# EAGLE board E-Piano-SM (EAGLE 9.4.0)
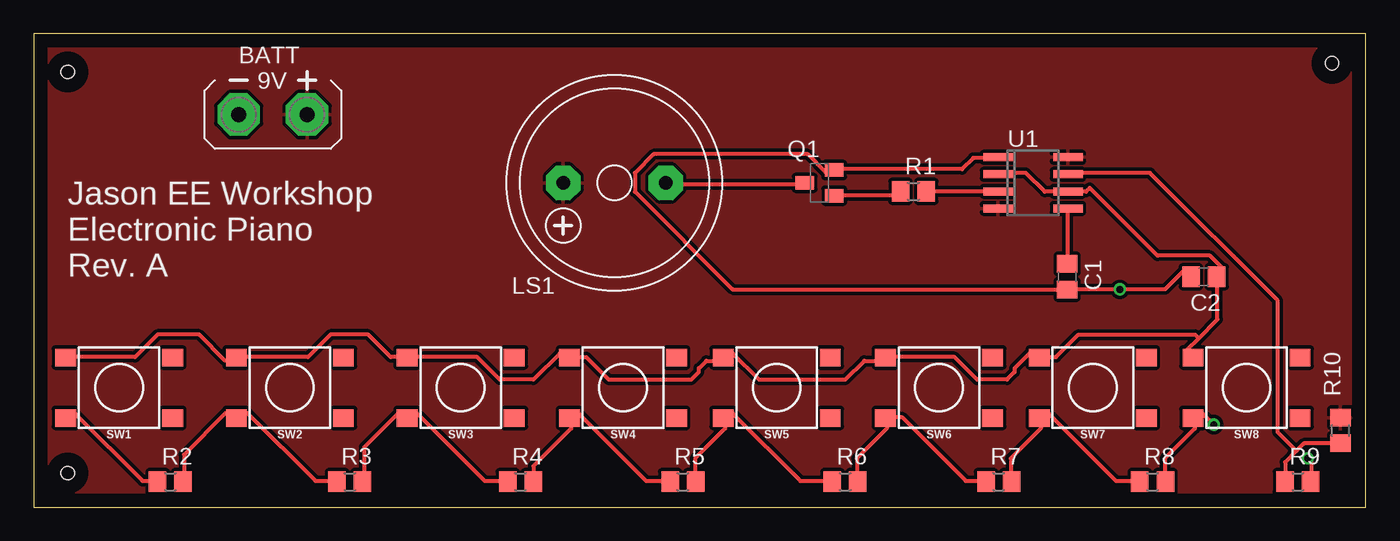
[diagram p0: board, top side]
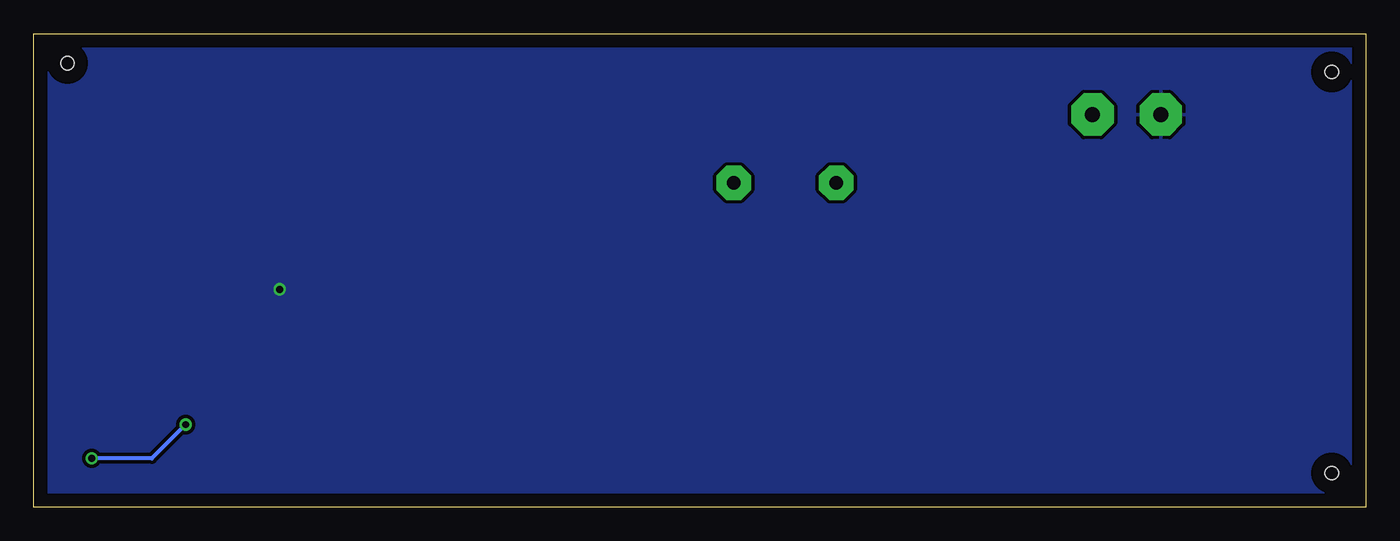
[diagram p1: board, bottom side, seen from below]

Size 99.04 x 35.23 mm. Coordinates in mm from the lower left corner, seen from the top.
Outline: 0,0 99.04,0 99.04,35.23 0,35.23 0,0
Copper layers (1*16): Top 0.035mm / dielectric 1.5mm / Bottom 0.035mm
Design rules "default": minimum track width 6mil, minimum drill 0.35mm, track to track 6mil, track to pad 6mil, pad to pad 6mil, via to via 6mil, smd to smd 6mil, copper to edge 40mil, drill to drill 6mil, minimum pad ring 10mil, minimum via ring 8mil, stop-mask expansion 4mil, vias tented up to drill 0mil, thermal gap 10mil
Net classes: 0 default: width 0.305 mm, drill 0.508 mm, clearance 0.254 mm
Holes 1 mm at 2.54,32.38 2.54,2.54 96.52,33.02

## Footprints (pad centres in the part's own frame; a part is rotated, then mirrored left to right if it is on the bottom)
AB9V = drill 1.118 pad 3.15 octagon: + 0,2.54; - 0,-2.54
C0805 = smd 1.3 x 1.5: 1 -0.95,0; 2 0.95,0
F/HMB = drill 1.016 pad 2.54 octagon: + 3.81,0; - -3.81,0
SOT23-BEC = smd 1 x 1.4: B -0.95,-1.1; C 0,1.1; E 0.95,-1.1
R0805 = smd 1.3 x 1.5: 1 -0.95,0; 2 0.95,0
TACTILE_SWITCH_SMD_6.2MM_TALL = smd 1.55 x 1.3: A1 -3.975,-2.25; A2 3.975,-2.25; B1 -3.975,2.25; B2 3.975,2.25
SO08 = smd 0.6 x 2.2: 1 -1.905,-2.6; 2 -0.635,-2.6; 3 0.635,-2.6; 4 1.905,-2.6; 5 1.905,2.6; 6 0.635,2.6; 7 -0.635,2.6; 8 -1.905,2.6

## Placement (x,y rotation side)
BATT  AB9V  [AB9V]  17.78,29.21 270 top
C1  0.1uF  [C0805]  76.83,17.14 270 top
C2  0.1uF  [C0805]  87,17.14 180 top
LS1  [F/HMB]  43.18,24.13 180 top
Q1  BCW66  [SOT23-BEC]  58.42,24.13 90 top
R1  3K  [R0805]  65.41,23.5 0 top
R2  1.5K  [R0805]  10.16,1.91 0 top
R3  1.3K  [R0805]  23.5,1.91 0 top
R4  620  [R0805]  36.2,1.91 0 top
R5  1.1K  [R0805]  48.26,1.91 0 top
R6  1K  [R0805]  60.33,1.91 0 top
R7  910  [R0805]  71.75,1.91 0 top
R8  390  [R0805]  83.19,1.91 0 top
R9  6.2K  [R0805]  93.98,1.91 0 top
R10  1K  [R0805]  97.16,5.71 90 top
SW1  MOMENTARY-SWITCH-SPST-SMD-6.2MM-TALL  [TACTILE_SWITCH_SMD_6.2MM_TALL]  6.35,8.89 180 top
SW2  MOMENTARY-SWITCH-SPST-SMD-6.2MM-TALL  [TACTILE_SWITCH_SMD_6.2MM_TALL]  19.05,8.89 180 top
SW3  MOMENTARY-SWITCH-SPST-SMD-6.2MM-TALL  [TACTILE_SWITCH_SMD_6.2MM_TALL]  31.75,8.89 180 top
SW4  MOMENTARY-SWITCH-SPST-SMD-6.2MM-TALL  [TACTILE_SWITCH_SMD_6.2MM_TALL]  43.81,8.89 180 top
SW5  MOMENTARY-SWITCH-SPST-SMD-6.2MM-TALL  [TACTILE_SWITCH_SMD_6.2MM_TALL]  55.24,8.89 180 top
SW6  MOMENTARY-SWITCH-SPST-SMD-6.2MM-TALL  [TACTILE_SWITCH_SMD_6.2MM_TALL]  67.31,8.89 180 top
SW7  MOMENTARY-SWITCH-SPST-SMD-6.2MM-TALL  [TACTILE_SWITCH_SMD_6.2MM_TALL]  78.74,8.89 180 top
SW8  MOMENTARY-SWITCH-SPST-SMD-6.2MM-TALL  [TACTILE_SWITCH_SMD_6.2MM_TALL]  90.17,8.89 180 top
U1  NE555D  [SO08]  74.3,24.13 270 top

## Library data of the parts
BATT = battery; MOUSER#: 534-81-8TB; MPN: 81-8; OC_NEWARK: unknown
C1 C2 = rcl; MOUSER#: 603-CC805JRX7R9BB104; MPN: CC805JRX7R9BB104; OC_NEWARK: unknown; SPICEPREFIX: C
LS1 = buzzer; MOUSER#: 665-AST-01508MR-R; OC_FARNELL: unknown; OC_NEWARK: unknown
Q1 = transistor; MF: FAIRCHILD SEMICONDUCTOR; MOUSER#: 726-BCW66KHE6327HTSA; MPN: PN2222ATF; OC_NEWARK: 58K2048
R1 R6 R10 = rcl; MOUSER#: 652-CR0805FX-1001ELF; OC_NEWARK: unknown; SPICEPREFIX: R
R2 = rcl; MOUSER#: 652-CR0805FX-1501ELF; OC_NEWARK: unknown; SPICEPREFIX: R
R3 = rcl; MOUSER#: 652-CR0805JW-132ELF; OC_NEWARK: unknown; SPICEPREFIX: R
R4 = rcl; MOUSER#: 652-CR0805JW-621ELF; OC_NEWARK: unknown; SPICEPREFIX: R
R5 = rcl; MOUSER#: 652-CR0805FX-1101ELF; OC_NEWARK: unknown; SPICEPREFIX: R
R7 = rcl; MOUSER#: 652-CR0805FX-9100ELF; OC_NEWARK: unknown; SPICEPREFIX: R
R8 = rcl; MOUSER#: 652-CR0805JW-391ELF; OC_NEWARK: unknown; SPICEPREFIX: R
R9 = rcl; MOUSER#: 652-CR0805FX-6201ELF; OC_NEWARK: unknown; SPICEPREFIX: R
SW1-SW8 = SparkFun-Switches; MOUSER#: 693-1301.9317; MPN: 1301.9317; OC_NEWARK: unknown; PROD_ID: SWCH-11966; SF_SKU: COM-12992
U1 = linear; MOUSER#: 595-TLC555CDR; OC_NEWARK: unknown

## Nets
0: BATT.- C1.2 C2.2 Q1.E U1.1
N$1: R8.2 R9.2 SW8.B2
N$2: R9.1 R10.1 U1.7
N$3: R2.1 SW1.B2
N$4: R7.2 R8.1 SW7.B2
N$5: R6.2 R7.1 SW6.B2
N$6: R5.2 R6.1 SW5.B2
N$7: R4.2 R5.1 SW4.B2
N$8: R3.2 R4.1 SW3.B2
N$9: R2.2 R3.1 SW2.B2
N$11: R1.2 U1.3
N$12: C1.1 U1.5
N$13: LS1.- Q1.C
N$14: Q1.B R1.1
TR: C2.1 SW1.A2 SW2.A2 SW3.A2 SW4.A2 SW5.A2 SW6.A2 SW7.A2 SW8.A2 U1.2 U1.6
VCC: BATT.+ LS1.+ R10.2 U1.4 U1.8

## Tracks (layer width: path | path; a pad name or v marks a point on that pad's centre or on a via)
0  (via drill 0.51)
  Top 0.305: C1.2 v80.75,16.2 84.1,16.2 85.5,17.6 85.78,17.6 86.06,17.32 C2.2 | U1.1 71.53,25.98 69.85,25.98 69.01,25.15 59.79,25.15 Q1.E 59.51,24.87 58.95,24.87 57.56,26.26 46.1,26.26 44.7,24.87 44.7,23.47 51.97,16.2 C1.2 | C1.2
  pour Bottom: 0,34.92 0,0 99.06,0 99.06,34.92
N$1  (via drill 0.51)
  Top 0.305: R8.2 84.1,1.96 84.1,3.63 86.33,5.87 86.33,6.43 SW8.B2 86.33,6.71 86.61,6.99 86.89,6.99 v87.73,6.15 | v94.72,3.63 95,3.35 95,1.96 R9.2
  Bottom 0.305: v94.72,3.63 90.25,3.63 v87.73,6.15
N$2
  Top 0.305: 93.88,4.19 94.44,4.75 96.95,4.75 R10.1 | 93.88,4.19 93.04,3.35 93.04,1.96 R9.1 | 93.88,4.19 92.48,5.59 92.48,15.37 82.98,24.87 77.11,24.87 U1.7
N$3
  Top 0.305: R2.1 8.94,1.96 8.1,1.96 3.07,6.99 2.79,6.99 2.52,6.71 SW1.B2
N$4
  Top 0.305: R7.2 72.64,1.96 72.64,3.63 74.88,5.87 74.88,6.43 SW7.B2 74.88,6.71 75.16,6.99 75.44,6.99 80.47,1.96 82.14,1.96 R8.1
N$5
  Top 0.305: R6.2 61.19,1.96 61.19,3.63 63.42,5.87 63.42,6.43 SW6.B2 63.42,6.71 64.54,6.71 69.29,1.96 70.69,1.96 R7.1
N$6
  Top 0.305: R5.2 49.17,1.96 49.17,3.63 51.41,5.87 51.41,6.43 SW5.B2 51.41,6.71 51.69,6.99 51.97,6.99 57,1.96 59.23,1.96 R6.1
N$7
  Top 0.305: R4.2 37.16,1.96 37.16,3.07 39.95,5.87 39.95,6.43 SW4.B2 39.95,6.71 40.23,6.99 40.51,6.99 45.54,1.96 47.22,1.96 R5.1
N$8
  Top 0.305: R3.2 24.59,1.96 24.59,4.47 27.1,6.99 27.38,6.99 27.66,6.71 SW3.B2 27.94,6.71 28.22,6.99 28.5,6.99 33.53,1.96 35.2,1.96 R4.1
N$9
  Top 0.305: R2.2 11.18,1.96 11.18,3.91 14.25,6.99 14.53,6.99 14.81,6.71 SW2.B2 15.09,6.71 15.37,6.99 15.93,6.99 20.95,1.96 22.35,1.96 R3.1
N$11
  Top 0.305: R1.2 66.5,23.47 71.53,23.47 U1.3
N$12
  Top 0.305: C1.1 76.83,22.07 U1.5
N$13
  Top 0.305: Q1.C 57.28,24.03 47.22,24.03 LS1.-
N$14
  Top 0.305: Q1.B 59.79,23.19 63.98,23.19 64.26,23.47 R1.1
TR
  Top 0.305: U1.2 71.81,24.87 73.76,24.87 75.16,23.47 76.83,23.47 U1.6 77.11,23.47 78.23,23.47 78.51,23.75 83.54,18.72 87.45,18.72 88.29,17.88 88.29,17.6 88.01,17.32 C2.1 88.01,17.04 88.01,13.97 86.61,12.57 | 86.61,12.57 85.78,11.73 85.78,11.46 86.06,11.18 SW8.A2 | 86.61,12.57 86.33,12.85 77.67,12.85 76,11.18 74.88,11.18 SW7.A2 74.6,11.18 74.32,11.46 74.04,11.46 72.92,10.34 72.92,10.06 72.36,9.5 70.13,9.5 68.45,11.18 63.42,11.18 SW6.A2 63.14,10.9 61.75,10.9 60.35,9.5 53.92,9.5 51.97,11.46 51.69,11.46 51.41,11.18 SW5.A2 51.13,10.9 50.01,10.9 49.45,10.34 49.45,10.06 48.9,9.5 42.75,9.5 41.07,11.18 39.95,11.18 SW4.A2 39.67,11.18 39.4,11.46 39.12,11.46 37.16,9.5 34.65,9.5 32.97,11.18 27.94,11.18 SW3.A2 27.66,11.18 26.54,11.18 24.87,12.85 22.07,12.85 20.4,11.18 15.09,11.18 SW2.A2 14.81,10.9 14.25,10.9 12.29,12.85 9.22,12.85 7.54,11.18 2.52,11.18 SW1.A2
VCC
  pour Top: 0,0 99.06,0 99.06,35.56 0,35.56

## Text on the board
tPlace: Jason EE Workshop / Electronic Piano / Rev. A